# Altium PCB Mach_actor_v1.PcbDoc
Units mm, origin at the board's own origin, x right, y up, seen from the top; angles counter-clockwise.
Board outline 128.27 x 73.66 mm, 2 copper layers (Top Layer, Bottom Layer); 116 components, 88 nets, 340 pads, 76 vias.
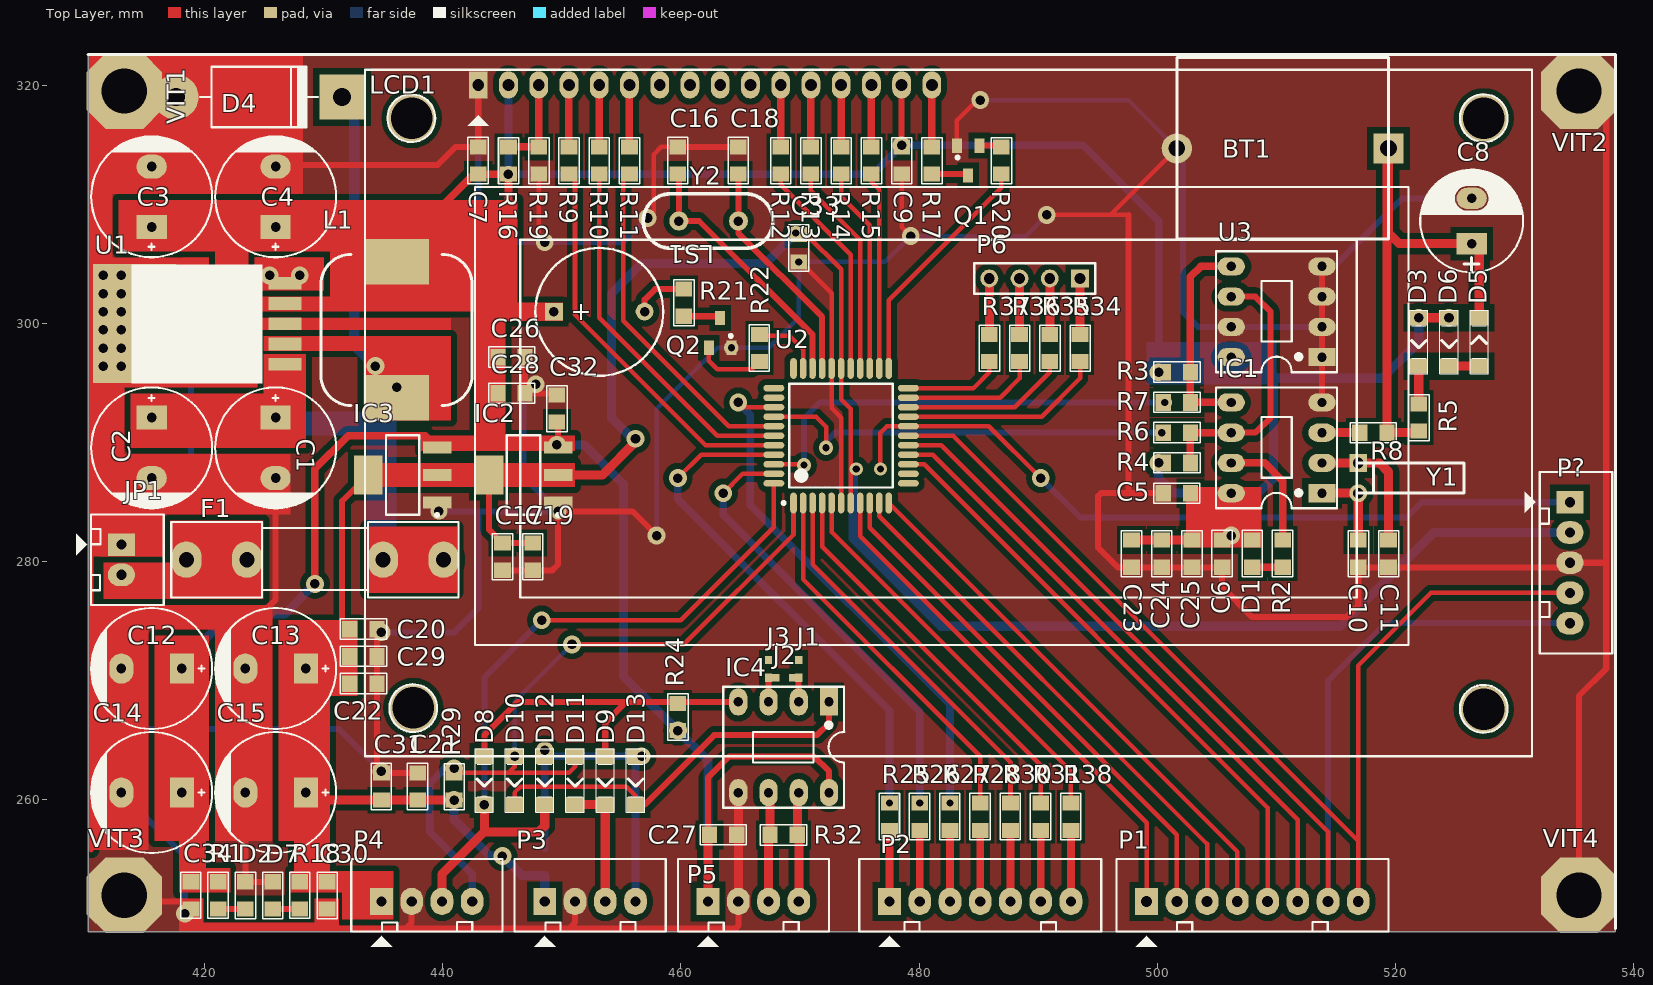
[diagram p0: Top Layer view]
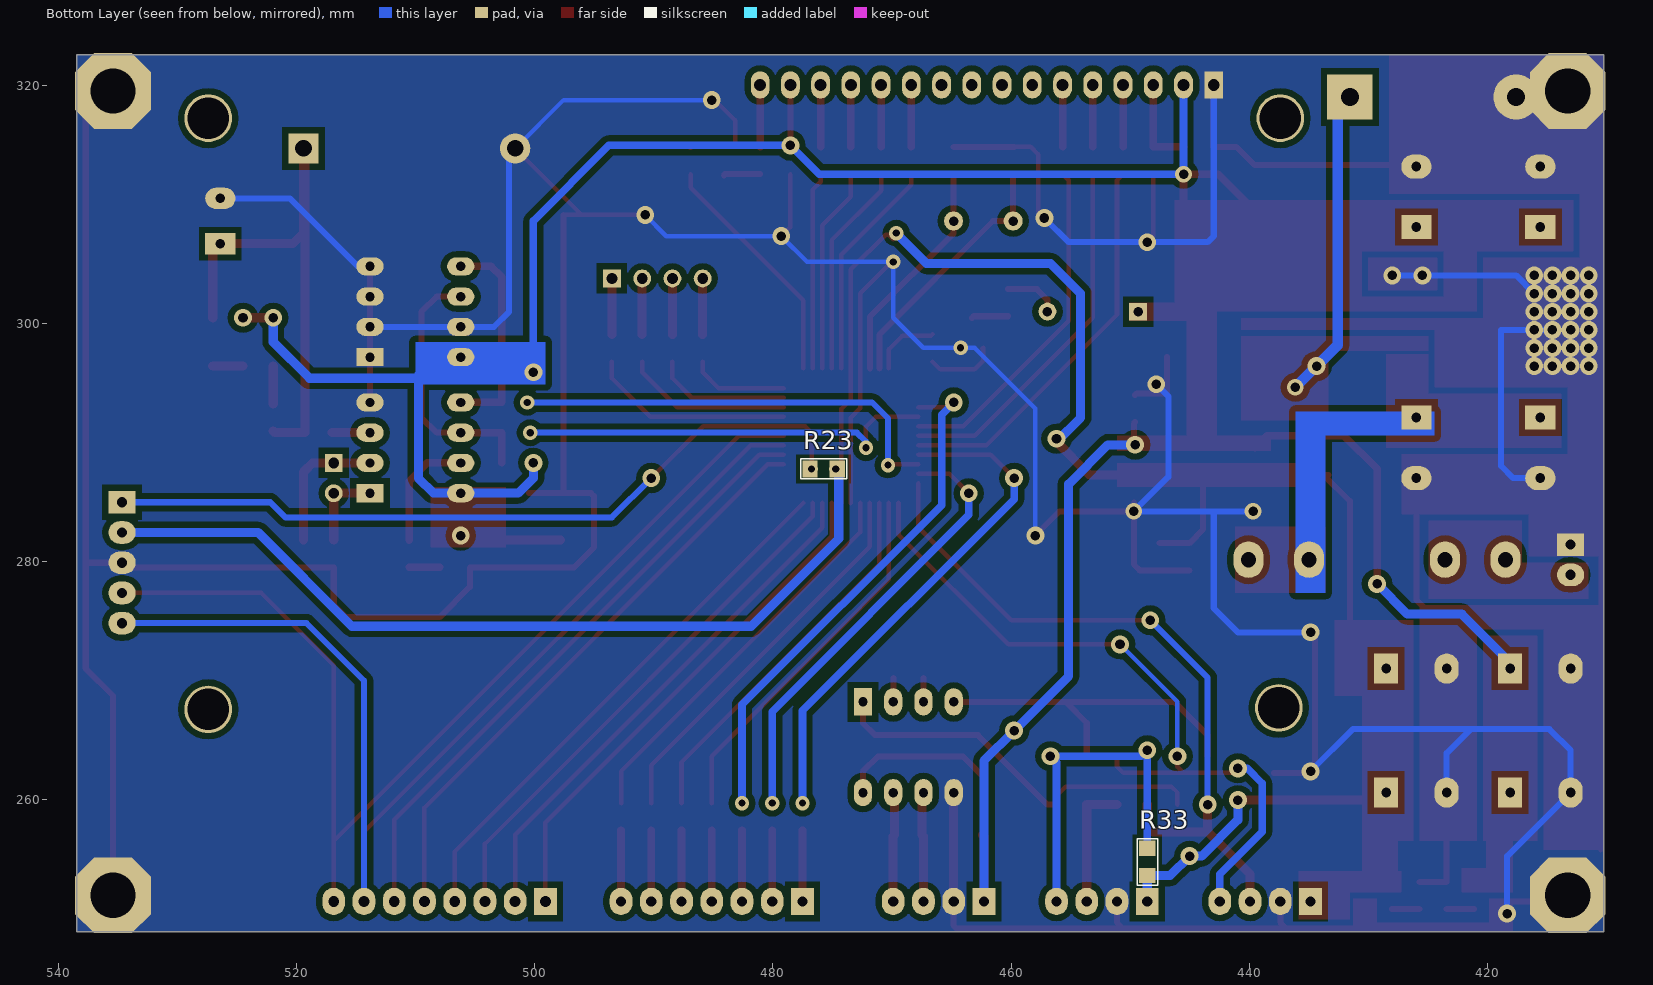
[diagram p1: Bottom Layer view, seen from below]
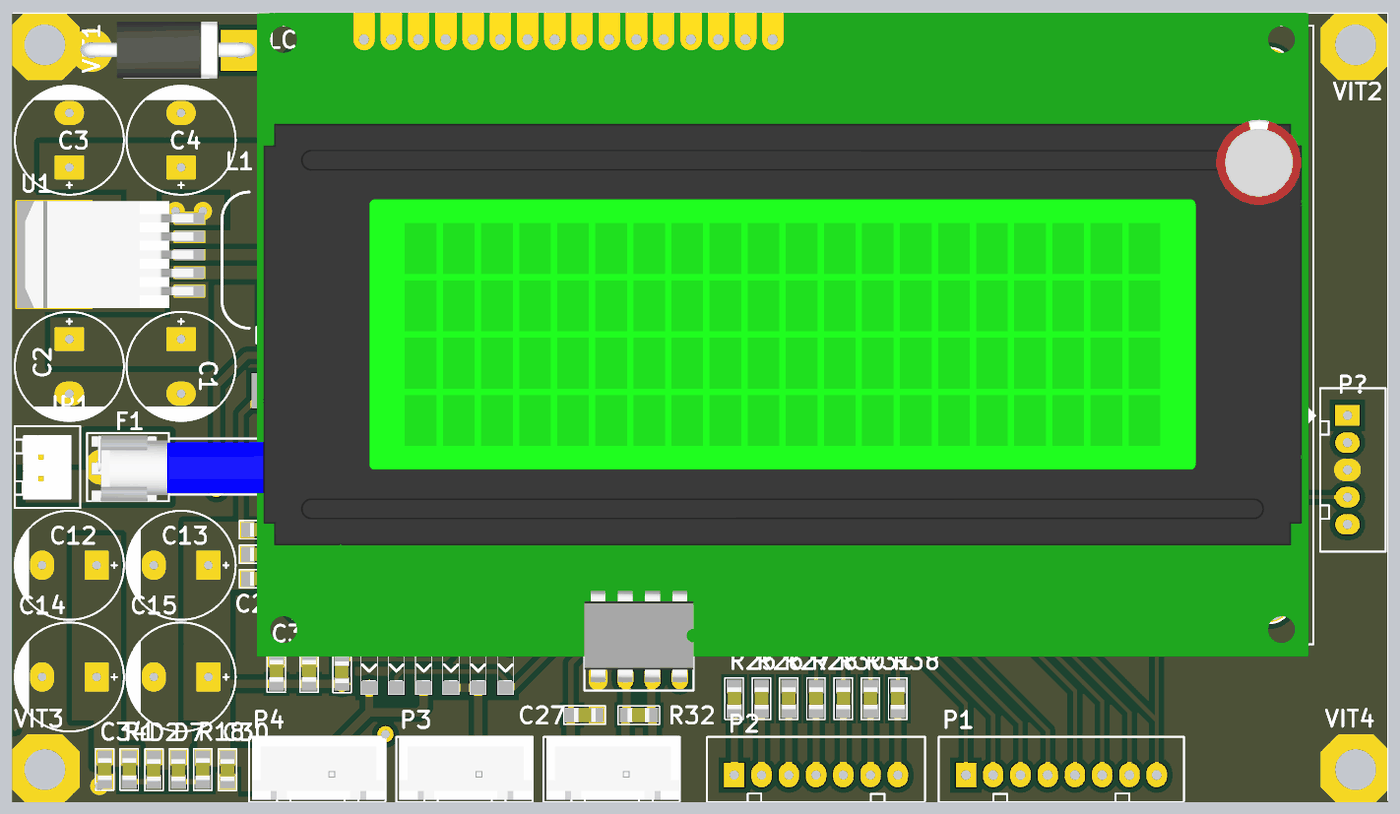
[diagram p2: 3D render of the assembled board from above, using the file's embedded part models]

## Layer stack, top to bottom
Top Layer: signal copper 0.0356
Dielectric: dielectric 0.32, FR-4, Dk 4.8
Bottom Layer: signal copper 0.0356

## Board outline
410.21,322.58 538.48,322.58 538.48,248.92 410.21,248.92

## Design rules (kind name [scope] priority, off if disabled: settings)
Clearance [All] p1: gap=0.508
PlaneConnect [All] p1: planeconnectstyle=Direct reliefexpansion=0.508 reliefentries=4 reliefconductorwidth=0.254 reliefairgap=0.254
PolygonConnect [All] p1: connectstyle=Direct reliefconductorwidth=0.254 reliefentries=4 polygonreliefangle="90 Angle"
RoutingVias [All] p1: holewidth=0.711 width=1.27 viastyle="Through Hole" minholewidth=0.711 minwidth=1.27 maxholewidth=0.711 maxwidth=1.27
SilkscreenOverComponentPads [All] p1: minsilkscreentomaskgap=0.254
SolderMaskExpansion [All] p1: expansion=0.102
Width [All] p1: maxlimit=2.54 minlimit=0.381 preferedwidth=0.508
26 further rules are at their usual default settings.

## Components (designator, comment, footprint, x,y, rotation, side; value= is the part's Value field where it differs from the comment)
BT1 "PIN 3V" PIN_NIMH 516.89,314.706 r180 top
C1 "1000uF/16V" CP2/4 425.958,292.1 r270 top
C2 "1000uF/16V" CP2/4 415.544,292.1 r270 top
C3 "1000uF/16V" CP2/4 415.544,308.102 r90 top
C4 "1000uF/16V" CP2/4 425.958,308.102 r90 top
C5 "104" SM-0805 501.65,285.75 r0 top
C6 "104" SM-0805 505.46,280.67 r270 top
C7 "104" SM-0805 442.976,313.69 r270 top
C8 "1000uF/16V" CP1.5/3.4 526.415,306.705 r90 top
C9 "104" SM-0805 478.536,313.69 r90 top
C10 "104" SM-0805 516.89,280.67 r90 top
C11 "104" SM-0805 519.43,280.67 r90 top
C12 "1000uF/16V" CP2/4 418.084,271.018 r180 top
C13 "1000uF/16V" CP2/4 428.498,271.018 r180 top
C14 "1000uF/16V" CP2/4 418.084,260.604 r180 top
C15 "1000uF/16V" CP2/4 428.498,260.604 r180 top
C16 "104" SM-0805 459.74,313.69 r270 top
C17 "104" SM-0805 445.008,280.416 r90 top
C18 "104" SM-0805 464.82,313.69 r270 top
C19 "104" SM-0805 447.548,280.416 r90 top
C20 "104" SM-0805 433.324,274.32 r180 top
C21 "104" SM-0805 437.896,261.112 r270 top
C22 "104" SM-0805 433.324,269.748 r180 top
C23 "104" SM-0805 497.84,280.67 r90 top
C24 "104" SM-0805 500.38,280.67 r90 top
C25 "104" SM-0805 502.92,280.67 r90 top
C26 "104" SM-0805 445.77,297.18 r180 top
C27 "104" SM-0805 463.55,257.048 r180 top
C28 "104" SM-0805 445.77,294.132 r180 top
C29 "104" SM-0805 433.324,272.034 r180 top
C30 "104" SM-0805 430.276,251.968 r90 top
C31 "104" SM-0805 434.848,261.112 r270 top
C32 "104" SM-0805 449.58,292.862 r90 top
C33 "104" SM-0805 469.9,306.324 r270 top
C34 "104" SM-0805 418.846,251.968 r270 top
D1 "LED5" SM-0805 508,280.67 r270 top
D2 "LED5" SM-0805 423.418,251.968 r90 top
D3 "1N4148" "1n4148 smd" 521.97,298.45 r270 top
D4 "1N5822" D5A 431.546,319.024 r180 top
D5 "1N4148" "1n4148 smd" 527.05,298.45 r90 top
D6 "1N4148" "1n4148 smd" 524.51,298.45 r270 top
D7 "LED5" SM-0805 425.704,251.968 r90 top
D8 "1N4148" "1n4148 smd" 443.484,261.62 r270 top
D9 "1N4148" "1n4148 smd" 453.644,261.62 r270 top
D10 "1N4148" "1n4148 smd" 446.024,261.62 r270 top
D11 "1N4148" "1n4148 smd" 451.104,261.62 r270 top
D12 "1N4148" "1n4148 smd" 448.564,261.62 r270 top
D13 "1N4148" "1n4148 smd" 456.184,261.62 r270 top
F1 "F1A" Fuse 429.26,280.162 r180 top
IC1 "DS1307" DIP8/W0.3 513.842,285.75 r90 top
IC2 "LM1117" SOT223-4N 446.786,287.274 r180 top
IC3 "LM1117" SOT223-4N 436.626,287.274 r180 top
IC4 "MAX485" DIP8/W0.3 472.44,268.224 r180 top
J1 "Jumper 2" "CAP 0402  TOP" 469.9,271.018 r270 top
J2 "Jumper 2" "CAP 0402  TOP" 468.63,270.256 r0 top
J3 "Jumper 2" "CAP 0402  TOP" 467.36,271.018 r270 top
JP1 "Connector 2" CON2 413.004,281.432 r270 top
L1 "300mH" Inductorsmd 442.468,293.116 r90 top
LCD1 "LCD 20x4A" LCD20X4A 442.976,320.04 r0 top
LS1 "Speaker" SPEAKER 449.326,300.99 r0 top
P1 "Header 8" con8 499.11,251.46 r0 top
P2 "Header 7" CON7 477.52,251.46 r0 top
P3 "Header 4" CON4 448.564,251.46 r0 top
P4 "Header 4" CON4 434.848,251.46 r0 top
P5 "Header 4" CON4 462.28,251.46 r0 top
P6 "Header 4" HDR1X4 493.522,303.784 r180 top
P? "Header 5" CON5 534.67,284.988 r270 top
Q1 "C1815" SOT23B 484.124,313.69 r180 top
Q2 "C1815" SOT23B 463.296,299.212 r0 top
R1 "2k2" SM-0805 421.132,251.968 r270 top
R2 "4K7" SM-0805 510.54,280.67 r270 top
R3 "4K7" SM-0805 501.65,295.91 r180 top
R4 "4K7" SM-0805 501.65,288.29 r180 top
R5 "10" SM-0805 521.97,292.1 r90 top
R6 "10" SM-0805 501.65,290.83 r180 top
R7 "10" SM-0805 501.65,293.37 r180 top
R8 "10" SM-0805 518.16,290.83 r0 top
R9 "10" SM-0805 450.596,313.69 r90 top
R10 "10" SM-0805 453.136,313.69 r90 top
R11 "10" SM-0805 455.676,313.69 r90 top
R12 "10" SM-0805 468.376,313.69 r90 top
R13 "10" SM-0805 470.916,313.69 r90 top
R14 "10" SM-0805 473.456,313.69 r90 top
R15 "10" SM-0805 475.996,313.69 r90 top
R16 "10k" SM-0805 445.516,313.69 r90 top
R17 "10" SM-0805 481.076,313.69 r90 top
R18 "2k2" SM-0805 427.99,251.968 r270 top
R19 "1k" SM-0805 448.056,313.69 r90 top
R20 "2k2" SM-0805 486.918,313.69 r90 top
R21 "220" SM-0805 460.248,301.752 r90 top
R22 "2k2" SM-0805 466.598,297.942 r270 top
R23 "10k" SM-0805 475.742,287.782 r0 bottom
R24 "10k" SM-0805 459.74,266.954 r90 top
R25 "2k2" SM-0805 477.52,258.572 r270 top
R26 "2k2" SM-0805 480.06,258.572 r270 top
R27 "2k2" SM-0805 482.6,258.572 r270 top
R28 "2k2" SM-0805 485.14,258.572 r270 top
R29 "10k" SM-0805 440.944,261.112 r90 top
R30 "2k2" SM-0805 487.68,258.572 r270 top
R31 "2k2" SM-0805 490.22,258.572 r270 top
R32 "2k2" SM-0805 468.63,257.048 r0 top
R33 "10k" SM-0805 448.564,254.787 r90 bottom
R34 "1k" SM-0805 493.522,297.942 r90 top
R35 "1k" SM-0805 490.982,297.942 r90 top
R36 "1k" SM-0805 488.442,297.942 r90 top
R37 "1k" SM-0805 485.902,297.942 r90 top
R38 "2k2" SM-0805 492.76,258.572 r270 top
U1 "LM2596T-5.0" TO263-5 426.72,299.974 r90 top
U2 "PIC18F46K20T-E/PT" TQFP-PT44_N 473.456,290.576 r90 top
U3 "24C02" DIP8/W0.3 513.842,297.18 r90 top
VIT1 "1" VIT 413.258,319.532 r0 top
VIT2 "1" VIT 535.432,319.532 r0 top
VIT3 "1" VIT 413.258,251.968 r0 top
VIT4 "1" VIT 535.432,251.968 r0 top
Y1 "32.768KHz" XTAL32K 516.89,288.29 r270 top
Y2 "4MHz" XTAL 462.28,308.61 r180 top

## Footprints (in the part's own frame and the unit in brackets; to place one, negate y for a bottom-side part, rotate by r counter-clockwise, add the part's x,y. Pads: shape width x height; smd on the part's side, far side on the other; paste and mask are expansions set on the pad)
"1n4148 smd" [mil]
  rect 50x60 smd: 1(-80,0) 2(80,0)
  silkscreen extent -105,-30 105,30, body extent -73,-31 73,31
"CAP 0402  TOP" [mm]
  rect 0.7x0.6 smd: 1(-0.721,-0.008) 2(0.778,-0.008)
  body extent -0.5,-0.3 0.5,0.3, height 0.2
CON2 [mil] "CON2"
  rect 75x90 hole 34: 1(0,0)
  oval 75x90 hole 34: 2(100,0)
  silkscreen extent -100,-150 200,140, body extent -68,-70 168,107, height 236
CON4 [mil] "CON4"
  rect 75x90 hole 34: 1(0,0)
  oval 75x90 hole 34: 2(100,0) 3(200,0) 4(300,0)
  silkscreen extent -100,-150 400,140, body extent -90,-90 398,136, height 276
CON5 [mil] "CON5"
  rect 75x90 hole 34: 1(0,0)
  oval 75x90 hole 34: 2(100,0) 3(200,0) 4(300,0) 5(400,0)
  silkscreen extent -100,-150 500,140
CON7 [mil] "CON7"
  rect 75x90 hole 34: 1(0,0)
  oval 75x90 hole 34: 2(100,0) 3(200,0) 4(300,0) 5(400,0) 6(500,0) 7(600,0)
  silkscreen extent -100,-150 700,140
con8 [mil] "CON8"
  rect 75x90 hole 36: 1(0,0)
  oval 75x90 hole 36: 2(100,0) 3(200,0) 4(300,0) 5(400,0) 6(500,0) 7(600,0) 8(700,0)
  silkscreen extent -100,-150 800,140
CP1.5/3.4 [mil] "Tu hoa 220->470uF,16V, 470uF/16V,25V"
  rect 70x100 hole 32: 1(0,0)
  oval 70x100 hole 32: 2(150,0)
  silkscreen extent -95,-170 245,170, body extent -85,-157 230,157, height 446
CP2/4 [mil] "Tu hoa 1000uF/16V/25V"
  rect 80x100 hole 32: 1(0,0)
  oval 80x100 hole 32: 2(200,0)
  silkscreen extent -100,-200 300,200
D5A [mil] "Diode 5A, W 200mil, L 550mil"
  round 150 hole 60: 1(550,0)
  rect 150x150 hole 60: 2(0,0)
  silkscreen extent 80,-100 470,100, body extent -52,-106 590,103, height 254
DIP8/W0.3 [mil] "8 PIN, W 300mil, Pin to pin 100mil"
  rect 60x90 hole 31: 1(0,0)
  oval 60x90 hole 31: 2(100,0) 3(200,0) 4(300,0) 5(300,300) 6(200,300) 7(100,300) 8(0,300)
  silkscreen extent -50,-50 350,350, body extent -50,-40 350,336, height 201
Fuse [mil] "De Fuse"
  oval 100x120 hole 50: 1(-425,0) 1(-225,0) 2(225,0) 2(425,0)
  silkscreen extent -475,-125 475,125, body extent -448,-117 459,127, height 378
HDR1X4 [mm] "Connector; Header; 4 Position"
  rect 1.5x1.5 hole 0.9: 1(0,0)
  round 1.5 hole 0.9: 2(2.54,0) 3(5.08,0) 4(7.62,0)
  silkscreen extent -1.27,-1.27 8.89,1.27, body extent -1.27,-1.27 8.89,1.27, height 7
Inductorsmd [mil] "12x12x6mm"
  rect 150x215 smd: 1(25,250) 2(475,250)
  silkscreen extent 0,0 500,500
LCD20X4A [mil] "LCD dipslay 20x4, 16 pin"
  rect 62x90 hole 39: 1(0,0)
  oval 62x90 hole 39: 2(100,0) 3(200,0) 4(300,0) 5(400,0) 6(500,0) 7(600,0) 8(700,0) 9(800,0) 10(900,0) 11(1000,0) 12(1100,0) 13(1200,0) 14(1300,0) 15(1400,0) 16(1500,0)
  round 157.48 hole 137.8: "Hole 0"(-220,-110) "Hole 0"(-215,-2060) "Hole 0"(3325,-2065) "Hole 0"(3325,-110)
  silkscreen extent -375,-2220 3485,50, body extent -392,-2264 3466,98, height 417
PIN_NIMH [mil] "Through hole button, column spacing 200mil"
  rect 100x100 hole 55: 1(-100,0)
  round 100 hole 55: 2(600,0)
  silkscreen extent -100,-300 600,300
SM-0805 [mil] "Compoment SMD 80x50mil"
  rect 50x55 smd: 1(-45,0) 2(45,0)
  silkscreen extent -77,-34 76,33, body extent -42,-25 38,25, height 24
SOT23B [mm] "SOT 23B"
  rect 0.85x1.2 smd: 1(0.94,-1.245) 2(0,1.25) 3(-0.95,-1.25)
  silkscreen extent 0.77,-0.38 1.02,-0.13, body extent -1.5,-1.3 1.5,1.2, height 1.06
SOT223-4N [mm] "SOT223, 4-Leads, Body 6.5x3.5mm, Pitch 2.3mm, Lead Span 7mm, IPC Medium Density"
  rect 2.4x1 smd: 1(-2.9,2.3) 2(-2.9,0) 3(-2.9,-2.3)
  rect 2.4x3.3 smd: 4(2.9,0)
  silkscreen extent -3.03,-3.35 1.4,3.47, body extent -3.39,-3.27 3.5,3.23, height 1.72
SPEAKER [mm]
  rect 1.5x1.5 hole 0.8: 1(0,0)
  round 1.5 hole 0.8: 2(7.62,0.013)
  silkscreen extent -1.55,-5.38 9.18,5.36, body extent -2.22,-6 13.24,6, height 4.5
TO263-5 [mm] "LM2576-SMD"
  rect 1.07x2.75 smd: 1(-3.4,-0.025) 2(-1.7,-0.025) 3(0,-0.025) 4(1.7,-0.025) 5(3.4,-0.025)
  rect 10x7 smd: 6(0.025,12.598)
  silkscreen extent -5,1.85 5,12.88, body extent -5,-0.38 5,15.29, height 4.79
TQFP-PT44_N [mm] "Thin QFP, 44-Leads, Body 10x10mm, Pitch 0.8mm, IPC Medium Density"
  oval 1.75x0.55 smd: 1(-5.65,4) 2(-5.65,3.2) 3(-5.65,2.4) 4(-5.65,1.6) 5(-5.65,0.8) 6(-5.65,0) 7(-5.65,-0.8) 8(-5.65,-1.6) 9(-5.65,-2.4) 10(-5.65,-3.2) 11(-5.65,-4) 23(5.65,-4) 24(5.65,-3.2) 25(5.65,-2.4) 26(5.65,-1.6) 27(5.65,-0.8) 28(5.65,0) 29(5.65,0.8) 30(5.65,1.6) 31(5.65,2.4) 32(5.65,3.2) 33(5.65,4)
  oval 0.55x1.75 smd: 12(-4,-5.65) 13(-3.2,-5.65) 14(-2.4,-5.65) 15(-1.6,-5.65) 16(-0.8,-5.65) 17(0,-5.65) 18(0.8,-5.65) 19(1.6,-5.65) 20(2.4,-5.65) 21(3.2,-5.65) 22(4,-5.65) 34(4,5.65) 35(3.2,5.65) 36(2.4,5.65) 37(1.6,5.65) 38(0.8,5.65) 39(0,5.65) 40(-0.8,5.65) 41(-1.6,5.65) 42(-2.4,5.65) 43(-3.2,5.65) 44(-4,5.65)
  silkscreen extent -5.77,-4.35 4.35,4.95, body extent -5,-5 5,5, height 1.2
VIT [mm] "VIT"
  oct 6.35x6.35 hole 3.81: VIT1(0,0)
XTAL [mm]
  round 1.6 hole 0.8: 1(-2.552,0.001) 2(2.448,0.001)
  silkscreen extent -5.44,-2.29 5.44,2.29, body extent -5.55,-2.32 5.62,2.35, height 3.63
XTAL32K [mm] "Connector; Header; 2 Position"
  rect 1.5x1.5 hole 0.9: 1(0,0)
  round 1.5 hole 0.9: 2(2.54,0)
  silkscreen extent 0,0 2.54,8.89

## Part data
BT1: "Battery 3VDC"
C1 C2 C3 C4 C8 C12 C13 C14 C15: library part CP4, "Cap 1000uF/16V - 220uF/50V"
C5 C6 C7 C9 C10 C11 C16 C17 C18 C19 C20 C21 C22 C23 C24 C25 C26 C27 C28 C29 C30 C31 C32 C33 C34: library part CM, "Cap SMD"
D1 D2 D7: library part "LED 5mm", "LED 5mm"
D3 D5 D6 D8 D9 D10 D11 D12 D13: library part D1A, "Diode 1A"
D4: library part D5A, "Diode 5A"
F1: library part Fuse, "Fuse"
IC1: "Real Timer Serial"
IC2 IC3: "3v3"
IC4: "RS232 - RS485 (Same sn75176)"
J1 J2 J3: library part "JP 2"
JP1: library part CON2
L1: library part L1, "Inductor"
LCD1: library part LCD20x4A, "LCD dipslay 20 char, 4 line"
LS1: "Loudspeaker"
P1: "Header, 8-Pin"
P2: "Header, 7-Pin"
P3 P4 P5 P6: "Header, 4-Pin"
P?: "Header, 5-Pin"
Q1 Q2: "NPN 600mW, ECB"
R1 R2 R3 R4 R5 R6 R7 R8 R9 R10 R11 R12 R13 R14 R15 R16 R17 R18 R19 R20 R21 R22 R23 R24 R25 R26 R27 R28 R29 R30 R31 R32 R33 R34 R35 R36 R37 R38: library part R, "Resistor 1/4W"
U1: library part LM2576T-5.0, "SIMPLE SWITCHER; 3A Step-Down Voltage Regulator"
U2: "Flash Microcontroller with 10-Bit A/D and nanoWatt Technology, 32K Flash, 44-Pin TQFP, Extended Temperature Range, Tape and Reel"
U3: "Two-wired Serial EEPROM 2K(256x6)"
VIT1 VIT2 VIT3 VIT4: library part VIT, "Oc Vit"
Y1: library part XTAL/32KHz, "Crystal Oscillator"
Y2: library part XTAL, "Crystal Oscillator"

## Via types
v1: diameter 1.5, hole 0.8, Top Layer to Bottom Layer, 60 vias
v2: diameter 1.2, hole 0.6, Top Layer to Bottom Layer, 10 vias
v3: diameter 1.4, hole 0.8, Top Layer to Bottom Layer, 4 vias
v4: diameter 1.1, hole 0.6, Top Layer to Bottom Layer, 2 vias

## Nets (pads, with @x,y where several pads share a name; then routed paths per layer and width w, separated by ;. In a path a pad name is that pad's centre, name@x,y a point inside that pad or via, vN(x,y) a via of type N, cw(c..) or ccw(c..) an arc to the next point about the centre after c; other vN are vias at no path point)
12V: F1.2 JP1.2
485_DE: J3.1
485_RE: J1.1
+3.3V: C13.1 C15.1 C17.2 C19.2 C20.2 C21.2 C22.2 C29.2 C30.2 C31.2 C33.1 IC2.2 IC2.4 IC3.2 IC3.4 P3.1 P4.1 P?.2 R18.1 R23.1 R29.1 R33.1 U2.7 U2.28 | length 225.1
  Top Layer w0.381: C33.1@469.9,307.086 470.281,307.467 470.535,307.467 473.456,304.546 U2.28 473.456,293.624 474.256,292.824 U2.7
  Top Layer w0.508: R18.1@428.498,253.619 R18.1 C30.2 433.197,253.111 P4.1 ; C15.1 C13.1 429.768,271.018 431.546,272.796 431.546,285.094 IC3.4 ; IC3.4@433.324,287.274 IC3.4 ; C19.2 C17.2 443.886,282.681 IC2.4 ; IC2.2 IC2.4 ; IC3.4 IC3.2 IC2.4
  Top Layer w0.762: C15.1 429.133,259.969 C31.2 C21.2 v1(440.944,259.969) ; IC2.2 453.39,287.274 v1@456.311,290.195
  Bottom Layer w0.762: v1(440.944,259.969) 440.944,258.318 443.992,255.27 v1(445.008,255.27) 446.634,253.644 R33.1 P3.1 ; v1@456.184,290.068 454.152,292.1 454.152,302.514 456.692,305.054 467.106,305.054 v2(469.646,307.594) ; v4(474.726,287.782) 474.472,287.528 474.472,281.94 481.838,274.574 515.366,274.574 523.24,282.448 P?.2
  other v1: 456.184,290.322
+5V: C3.1 C4.1 C5.2 C6.1 C7.2 C9.2 C12.1 C14.1 C23.2 C24.2 C25.2 C26.2 C27.2 C28.2 C32.1 C34.1 D1.1 D3.1 D6.1 IC1.8 IC2.3 IC3.3 IC4.8 L1.2 LCD1.2 LCD1.15 LS1.1 P5.1 R1.1 R3.2 R4.2 R16.1 R24.1 U1.4 U3.8 | length 366.9
  Top Layer w0.508: C3.1 421.64,308.102 ; C12.1 C14.1 418.084,253.873 C34.1 R1.1 ; C4.1 421.64,308.102 ; L1.2@436.118,306.07 L1.2 ; IC3.3 443.484,289.574 ; 444.627,294.894 443.484,294.894 ; C32.1 449.686,291.613 IC2.3 443.484,289.574 ; C27.2@462.28,256.921 462.28,261.874 464.058,263.652 471.17,263.652 472.44,262.382 IC4.8 ; C9.2 v1(478.536,314.96) LCD1.15 ; 421.64,308.102 421.64,302.768 422.734,301.674 U1.4 434.516,301.674 435.61,302.768 435.61,304.673 L1.2 ; L1.2 441.579,305.181 443.484,303.276 443.484,294.894 ; 443.484,289.574 443.484,294.894
  Top Layer w0.635: v1(429.26,278.13) 429.26,287.782 432.054,290.576 438.524,290.576 IC3.3 ; L1.2@435.61,304.673 435.61,305.181 L1.2@436.118,305.689 ; L1.2@436.118,306.07 442.595,312.547 C7.2 v3(445.516,312.547) 445.516,301.752 446.278,300.99 LS1.1
  Top Layer w0.762: P5.1 462.28,256.921 C27.2 ; C23.2 C24.2 C25.2 C6.1 ; C5.2 IC1.8 506.222,282.575 C6.1 ; D1.1 C6.1 ; v1(521.97,300.482) v1(524.51,300.482)
  Bottom Layer w0.635: LCD1.2 v3(445.516,312.547) 476.123,312.547 v1(478.536,314.96) 493.776,314.96 500.126,308.61 v1(500.126,295.91)
  Bottom Layer w0.762: C12.1 418.084,271.526 422.148,275.59 426.72,275.59 v1(429.26,278.13) ; v1(449.58,289.814) 451.866,289.814 455.168,286.512 455.168,270.383 v1(459.74,265.811) 462.28,263.271 P5.1 ; v1(500.126,288.29) 500.126,287.02 501.396,285.75 IC1.8 508.508,285.75 509.778,287.02 509.778,295.148 ; U3.8 508.254,297.18 509.778,295.656 509.778,295.402 518.922,295.402 521.97,298.45 v1(521.97,300.482)
  other v1: 506.222,282.194
A: IC4.6 P5.3 R32.1 | length 9.2
  Top Layer w0.762: P5.3 467.36,256.921 R32.1 467.487,260.477 IC4.6
B: IC4.7 P5.4 R32.2 | length 9.2
  Top Layer w0.762: P5.4 469.9,256.921 R32.2 469.773,260.477 IC4.7
D4: R12.1 U2.27 | length 18.8
  Top Layer w0.381: R12.1 468.376,311.658 474.256,305.778 U2.27
D5: R13.1 U2.26 | length 18
  Top Layer w0.381: R13.1 470.916,311.15 475.056,307.01 U2.26
D6: R14.1 U2.25 | length 17.3
  Top Layer w0.381: R14.1 473.456,310.642 475.856,308.242 U2.25
D7: R15.1 U2.24 | length 16.6
  Top Layer w0.381: R15.1 475.996,311.912 476.656,311.252 U2.24
EN: R11.1 U2.38 | length 28.8
  Top Layer w0.381: R11.1 455.168,312.039 455.168,300.228 464.02,291.376 U2.38
GND: BT1.2 C1.2 C2.2 C3.2 C4.2 C5.1 C6.2 C7.1 C8.2 C9.1 C10.1 C11.1 C12.2 C13.2 C14.2 C15.2 C16.1 C17.1 C18.1 C19.1 C20.1 C21.1 C22.1 C23.1 C24.1 C25.1 C26.1 C27.1 C28.1 C29.1 C30.1 C31.1 C32.2 C33.2 C34.2 D2.2 D4.1 D7.2 IC1.4 IC2.1 IC3.1 IC4.5 JP1.1 LCD1.1 P3.2 P4.2 P5.2 P?.3 Q1.1 Q2.1 R19.1 U1.3 U1.5 U2.6 U2.29 U3.1 U3.2 U3.3 U3.4 U3.7 VIT1.VIT1 VIT2.VIT1 VIT3.VIT1 VIT4.VIT1 | length 711.9
  Top Layer w0.381: R19.1 448.056,307.34 v1(448.564,306.832) ; v1(457.2,308.864) 457.708,309.372 457.708,314.198 458.343,314.833 C16.1 ; C33.2@470.154,305.054 472.656,302.552 U2.29 472.656,292.9 473.456,292.1 U2.6 ; C9.1 478.536,308.102 v1(479.298,307.34) ; Q1.1 483.184,317.068 484.886,318.77 v1(485.14,318.77) ; v1(490.728,309.118) 497.586,309.118 ; 496.062,309.118 BT1.2
  Top Layer w0.508: C14.2 C12.2 ; VIT3.VIT1 415.036,251.968 415.544,251.46 418.211,251.46 C34.2 418.846,249.936 419.608,249.174 430.276,249.174 ; v1@414.122,299.999 414.147,299.974 U1.3 ; C2.2 C1.2 425.958,276.798 425.258,276.098 425.196,276.098 424.434,275.336 ; C3.2 C4.2 ; D4.1 417.83,318.77 424.688,318.77 425.958,317.5 C4.2 ; C13.2 C15.2 D2.2 D7.2 ; C30.1 430.276,249.174 ; C20.1 C29.1 C22.1 434.467,262.636 C31.1 C21.1 ; P4.2 437.388,249.682 436.88,249.174 ; LCD1.1 C7.1 441.071,314.833 439.547,313.309 426.085,313.309 C4.2 ; C17.1 C19.1 449.199,279.273 449.686,279.76 v3(449.686,284.226) ; C26.1 C28.1 449.453,294.132 C32.2 ; IC2.1 v3(449.686,284.226) ; P3.2 451.104,249.682 450.596,249.174 ; v1(457.962,282.194) 455.93,284.226 v3(449.686,284.226) ; C16.1 C18.1 ; P5.2 464.82,249.428 464.566,249.174 450.596,249.174 ; 497.586,309.118 497.586,285.75 ; C5.1 497.586,285.75 ; IC1.4 U3.1 U3.2 U3.3 U3.4 ; VIT4.VIT1 535.432,268.732 537.718,271.018 537.718,279.908 ; VIT2.VIT1 537.718,317.246 537.718,279.908 ; 430.276,249.174 436.88,249.174 ; 436.88,249.174 450.596,249.174 ; 497.586,285.75 495.3,285.75 495.046,285.496 495.046,281.178 496.697,279.527 C23.1 C24.1 C25.1 C6.2 505.46,277.876 508,275.336 515.874,275.336 516.89,276.352 C10.1 C11.1 534.289,279.527 P?.3 537.718,279.908
  Top Layer w0.762: P5.2 IC4.5
  Bottom Layer w0.381: v1(457.962,282.194) 457.962,292.862 463.067,297.967 v2(464.236,297.967) 467.385,297.967 469.9,300.482 v2(469.9,305.181) 477.139,305.181 v1(479.298,307.34) 488.95,307.34 v1(490.728,309.118) ; v1(485.14,318.77) 497.586,318.77 BT1.2
  Bottom Layer w0.508: v1@414.274,299.212 v1(414.528,299.466) 418.846,299.466 418.846,288.036 417.83,287.02 C2.2 ; v1(416.052,302.514) 417.576,304.038 v1(425.45,304.038) v1(427.99,304.038) ; v1(418.338,250.444) 418.338,255.27 C14.2 413.004,264.16 414.782,265.938 421.386,265.938 ; C15.2 423.418,263.906 421.386,265.938 ; v1(434.848,262.382) 431.292,265.938 421.386,265.938 ; v1@435.102,274.32 v1(434.848,274.066) 440.944,274.066 442.976,276.098 442.976,284.226 ; v3(439.674,284.226) 442.976,284.226 ; LCD1.1 442.976,307.34 443.484,306.832 v1(448.564,306.832) 455.168,306.832 v1(457.2,308.864) ; v1(447.802,294.894) 446.786,293.878 446.786,287.126 v3(449.686,284.226) 442.976,284.226 ; BT1.2 502.158,314.198 502.158,300.99 503.428,299.72 U3.7 U3.2 ; U3.4 514.858,304.8 520.573,310.515 C8.2
  other v1: 411.48,296.418 413.004,296.418 414.528,296.418 416.052,296.418 411.48,297.942 413.004,297.942 414.528,297.942 416.052,297.942 411.48,299.466 413.004,299.466 416.052,299.466 411.48,300.99 413.004,300.99 414.528,300.99 416.052,300.99 411.48,302.514 413.004,302.514 414.528,302.514 411.48,304.038 413.004,304.038 414.528,304.038 416.052,304.038
LED_LCD: R20.1 U2.23 | length 20.2
  Top Layer w0.381: U2.23 477.456,301.942 486.918,311.404 R20.1
NetBT1_1: BT1.1 C8.1 D5.2 R5.1 R8.2 | length 47.6
  Top Layer w0.762: R5.1 521.843,290.83 R8.2 519.303,314.579 BT1.1 519.43,307.594 520.319,306.705 C8.1 527.05,306.07 D5.2
NetC1_1: C1.1 C2.1 F1.1 U1.1 | length 35.1
  Top Layer w0.508: C2.1 C1.1 426.745,292.887 U1.1
  Bottom Layer w0.508: C1.1 433.07,292.1 434.975,290.195 F1.1@434.975,280.162
NetC10_2: C10.2 IC1.1 Y1.2 | length 7
  Top Layer w0.762: IC1.1 Y1.2 C10.2
NetC11_2: C11.2 IC1.2 Y1.1 | length 11.6
  Top Layer w0.762: IC1.2 Y1.1 518.668,288.29 519.43,287.528 C11.2
NetD1_2: D1.2 R2.2 | length 2.5
  Top Layer w0.635: D1.2 R2.2
NetD2_1: D2.1 R1.2 | length 2.3
  Top Layer w0.508: R1.2 D2.1
NetD3_2: D3.2 R5.2 | length 3.2
  Top Layer w0.762: R5.2 D3.2
NetD4_2: D4.2 L1.1 U1.2 | length 39.8
  Top Layer w0.508: U1.2 435.532,298.274 436.118,297.688 v3(436.118,294.64) L1.1
  Bottom Layer w0.889: D4.2 432.562,318.008 432.562,298.196 v3(436.118,294.64)
  other v1: 434.34,296.418
NetD5_1: D5.1 D6.2 | length 2.5
  Top Layer w0.762: D6.2 D5.1
NetD7_1: D7.1 R18.2 | length 2.3
  Top Layer w0.508: D7.1 R18.2
NetIC1_3: IC1.3 R8.1 | length 3.2
  Top Layer w0.762: IC1.3 R8.1
NetIC1_7: IC1.7 R2.1 | length 9.9
  Top Layer w0.635: IC1.7 509.016,288.29 510.54,286.766 R2.1
NetLCD1_3: LCD1.3 R16.2 R19.2 | length 7.7
  Top Layer w0.635: R16.2 R19.2 LCD1.3
NetLCD1_4: LCD1.4 R9.2 | length 5.2
  Top Layer w0.635: R9.2 LCD1.4
NetLCD1_5: LCD1.5 R10.2 | length 5.2
  Top Layer w0.635: R10.2 LCD1.5
NetLCD1_6: LCD1.6 R11.2 | length 5.2
  Top Layer w0.635: R11.2 LCD1.6
NetLCD1_11: LCD1.11 R12.2 | length 5.2
  Top Layer w0.635: R12.2 LCD1.11
NetLCD1_12: LCD1.12 R13.2 | length 5.2
  Top Layer w0.635: R13.2 LCD1.12
NetLCD1_13: LCD1.13 R14.2 | length 5.2
  Top Layer w0.635: R14.2 LCD1.13
NetLCD1_14: LCD1.14 R15.2 | length 5.2
  Top Layer w0.635: R15.2 LCD1.14
NetLCD1_16: LCD1.16 R17.2 | length 5.2
  Top Layer w0.635: R17.2 LCD1.16
NetLS1_2: LS1.2 R21.2 | length 4.7
  Top Layer w0.508: LS1.2 456.946,302.006 457.835,302.895 R21.2
NetP1_1: P1.1 U2.8 | length 43.4
  Top Layer w0.381: U2.8 475.056,282.118 499.11,258.064 P1.1
NetP1_2: P1.2 U2.9 | length 44.2
  Top Layer w0.381: U2.9 475.856,282.842 501.65,257.048 P1.2
NetP1_3: P1.3 U2.10 | length 44.9
  Top Layer w0.381: U2.10 476.656,283.82 504.19,256.286 P1.3
NetP1_4: P1.4 U2.11 | length 45.6
  Top Layer w0.381: U2.11 506.73,255.652 P1.4
NetP1_5: P1.5 U2.14 | length 50
  Top Layer w0.381: U2.14 480.428,288.176 509.27,259.334 P1.5
NetP1_6: P1.6 U2.15 | length 52.3
  Top Layer w0.381: U2.15 481.152,288.976 511.81,258.318 P1.6
NetP2_1: P2.1 R25.2 | length 6
  Top Layer w0.635: P2.1 R25.2
NetP2_2: P2.2 R26.2 | length 6
  Top Layer w0.635: P2.2 R26.2
NetP2_3: P2.3 R27.2 | length 6
  Top Layer w0.635: P2.3 R27.2
NetP2_4: P2.4 R28.2 | length 6
  Top Layer w0.635: P2.4 R28.2
NetP2_5: P2.5 R30.2 | length 6
  Top Layer w0.635: P2.5 R30.2
NetP2_6: P2.6 R31.2 | length 6
  Top Layer w0.635: P2.6 R31.2
NetP2_7: P2.7 R38.2 | length 6
  Top Layer w0.635: P2.7 R38.2
NetP6_1: P6.1 R34.2 | length 4.7
  Top Layer w0.762: R34.2 P6.1
NetP6_2: P6.2 R35.2 | length 4.7
  Top Layer w0.762: R35.2 P6.2
NetP6_3: P6.3 R36.2 | length 4.7
  Top Layer w0.762: R36.2 P6.3
NetP6_4: P6.4 R37.2 | length 4.7
  Top Layer w0.762: R37.2 P6.4
NetQ1_2: Q1.2 R17.1 | length 3.1
  Top Layer w0.508: R17.1 484.017,312.547 Q1.2
NetQ1_3: Q1.3 R20.2 | length 1.9
  Top Layer w0.508: Q1.3 486.811,314.94 R20.2
NetQ2_2: Q2.2 R21.1 | length 3.1
  Top Layer w0.508: R21.1 463.149,300.609 Q2.2
NetQ2_3: Q2.3 R22.2 | length 6
  Top Layer w0.381: Q2.3@462.407,297.901 Q2.3 462.346,296.86 463.042,296.164 465.963,296.164 R22.2
NetR34_1: R34.1 U2.19 | length 17.1
  Top Layer w0.381: U2.19 490.296,292.176 493.522,295.402 R34.1
NetR35_1: R35.1 U2.20 | length 14
  Top Layer w0.381: U2.20 488.048,292.976 490.982,295.91 R35.1
NetR36_1: R36.1 U2.21 | length 11.4
  Top Layer w0.381: U2.21 486.816,293.776 488.442,295.402 R36.1
NetR37_1: R37.1 U2.22 | length 8.2
  Top Layer w0.381: U2.22 484.568,294.576 485.902,295.91 R37.1
PGC: P1.7 P?.5 U2.16 | length 95.4
  Top Layer w0.381: U2.16 481.876,289.776 514.35,257.302 P1.7
  Bottom Layer w0.508: P1.7 514.35,270.002 519.176,274.828 P?.5
PGD: P1.8 P?.4 U2.17 | length 92
  Top Layer w0.381: U2.17 482.854,290.576 516.89,256.54 ; P1.8 516.89,256.54 ; P?.4 522.986,277.368 516.89,271.272 516.89,256.54
RESET: P?.1 R23.2 U2.18 | length 64.9
  Top Layer w0.381: v4(476.758,287.782) 476.758,290.83 477.304,291.376 U2.18 485.864,291.376 v1(490.22,287.02)
  Bottom Layer w0.508: v1(490.22,287.02) 493.522,283.718 520.954,283.718 522.224,284.988 P?.1
RL1: R25.1 U2.41 | length 43.5
  Top Layer w0.381: v1(459.74,287.02) 461.696,288.976 U2.41
  Bottom Layer w0.635: v1(459.74,287.02) 459.74,285.242 477.52,267.462 v2(477.52,259.715)
RL2: R26.1 U2.43 | length 37.8
  Top Layer w0.381: v1(463.55,285.75) 465.176,287.376 U2.43
  Bottom Layer w0.635: v1(463.55,285.75) 463.55,283.92 480.06,267.41 v2(480.06,259.715)
RL3: R27.1 U2.36 | length 44.2
  Top Layer w0.381: v1(464.82,293.37) 465.214,292.976 U2.36
  Bottom Layer w0.635: v1(464.82,293.37) 465.836,292.354 465.836,284.734 482.6,267.97 v2(482.6,259.715)
RL4: R28.1 U2.2 | length 31.4
  Top Layer w0.381: U2.2 470.256,278.536 485.14,263.652 R28.1
RL5: R30.1 U2.3 | length 32.1
  Top Layer w0.381: U2.3 471.056,279.768 487.68,263.144 R30.1
RL6: R31.1 U2.4 | length 32.8
  Top Layer w0.381: U2.4 471.856,281.254 490.22,262.89 R31.1
RL7: R38.1 U2.5 | length 33.5
  Top Layer w0.381: U2.5 472.656,282.486 492.76,262.382 R38.1
RS: R9.1 U2.40 | length 33.3
  Top Layer w0.381: R9.1 451.104,312.039 451.104,300.736 462.064,289.776 U2.40
RS485_DE: IC4.3 J2.1 J3.2 | length 2
  Top Layer w0.508: J3.2 467.352,268.232 IC4.3
RS485_RE: IC4.2 J1.2 J2.2 | length 2
  Top Layer w0.508: J1.2 469.892,268.232 IC4.2
RW: R10.1 U2.39 | length 30.8
  Top Layer w0.381: R10.1 453.136,300.482 463.042,290.576 U2.39
RX_485: D8.1 D9.1 IC4.4 R24.2 | length 29.6
  Top Layer w0.508: D8.1 443.484,265.43 446.278,268.224 455.422,268.224 ; D9.1 453.644,266.446 455.422,268.224 ; IC4.4 455.422,268.224
RX_PIC: D10.1 D11.1 P4.4 R29.2 U2.1 | length 63.3
  Top Layer w0.381: R29.2 445.516,262.255 ; v1(446.024,263.652) 446.024,262.763 445.516,262.255 ; v1(450.85,273.05) 460.248,273.05 469.456,282.258 U2.1 ; D11.1 451.104,262.763 450.596,262.255 445.516,262.255
  Bottom Layer w0.381: v1(446.024,263.652) 446.024,268.224 v1(450.85,273.05)
  Bottom Layer w0.635: v1(440.944,262.636) 440.182,262.636 438.912,261.366 438.912,257.302 442.468,253.746 P4.4
RX_ZIGBEE: D12.1 D13.1 P3.4 R33.2 | length 29
  Bottom Layer w0.635: R33.2 v1(448.564,264.16) 449.072,263.652 v1(456.692,263.652) 456.184,263.144 P3.4
SCL: R6.2 U2.37 | length 35.5
  Top Layer w0.381: U2.37 471.348,292.176 472.186,291.338 v2(472.186,289.56)
  Bottom Layer w0.508: v2(472.186,289.56) 472.186,290.068 472.948,290.83 v2(500.38,290.83)
SCL': IC1.6 R4.1 R6.1 U3.6 | length 22.5
  Top Layer w0.508: IC1.6 508.254,290.83 509.524,292.1 509.524,300.99 508.254,302.26 U3.6
  Top Layer w0.635: R4.1 R6.1 IC1.6
SDA: R7.2 U2.42 | length 37.4
  Top Layer w0.381: U2.42 470.268,288.176 v2@470.408,288.036
  Bottom Layer w0.508: v2(470.338,288.106) 470.338,292.03 471.678,293.37 v2(500.634,293.37)
SDA': IC1.5 R3.1 R7.1 U3.5 | length 17.8
  Top Layer w0.635: IC1.5 R7.1 R3.1 502.793,303.911 503.682,304.8 U3.5
SPEAKER: R22.1 U2.32 | length 5.8
  Top Layer w0.381: R22.1 466.725,298.958 469.138,298.958 470.256,297.84 U2.32
TX_485: D10.2 D13.2 IC4.1 | length 33.3
  Top Layer w0.381: D10.2 446.024,260.604 446.532,261.112 455.422,261.112 456.184,260.35 D13.2
  Top Layer w0.508: D13.2 456.946,259.588 462.788,265.43 471.424,265.43 472.44,266.446 IC4.1
TX_PIC: D8.2 D12.2 P4.3 U2.44 | length 60.6
  Top Layer w0.381: v1(448.31,275.082) 459.994,275.082 467.806,282.894 U2.44
  Top Layer w0.762: P4.3 439.928,253.746 443.484,257.302 ; v1(443.484,259.588) 443.484,257.302 ; D12.2 448.564,257.81 448.056,257.302 443.484,257.302
  Bottom Layer w0.508: v1(443.484,259.588) 443.484,270.256 v1(448.31,275.082)
TX_ZIGBEE: D9.2 D11.2 P3.3 | length 10.7
  Top Layer w0.762: D11.2 D9.2 P3.3
X1: C16.2 U2.31 Y2.2 | length 22
  Top Layer w0.508: C16.2 459.832,312.455 Y2.2 461.519,308.609 471.056,299.072 U2.31
X2: C18.2 U2.30 Y2.1 | length 19.2
  Top Layer w0.508: C18.2 464.832,312.535 Y2.1 464.832,307.582 471.856,300.558 U2.30
pads on no net: "LCD1.Hole 0" LCD1.7 LCD1.8 LCD1.9 LCD1.10 U1.6 U2.12 U2.13 U2.33 U2.34 U2.35
copper on no net: | length 25.7
  Top Layer w0.381: 410.464,255.778 410.464,281.432

## Polygon pours and split planes (outlines as drawn)
GND on Top Layer "Bottom Layer-No Net" (solid, pour order 4): 410.21,248.92 538.48,248.92 538.48,322.58 410.21,322.58
GND on Bottom Layer "Bottom Layer-No Net" (solid, pour order 4): 410.21,248.92 538.48,248.92 538.48,322.58 410.21,322.58

## Other copper
Top Layer:
  rectangle net +3.3V: 426.212,268.732 432.816,275.082
  rectangle net GND: 410.21,280.416 413.258,295.148
  rectangle net +5V: 445.008,300.228 450.088,301.752
  rectangle net +3.3V: 431.546,249.936 435.864,252.222
  rectangle net +3.3V: 427.228,252.222 435.864,254
  rectangle net GND: 429.26,248.92 431.292,251.714
  rectangle net GND: 419.862,248.92 431.292,249.682
  rectangle net GND: 417.83,248.92 419.862,251.714
  rectangle net +5V: 420.116,252.222 422.148,254.254
  rectangle net +5V: 417.83,252.222 420.116,256.54
  rectangle net GND: 420.878,256.54 425.704,274.32
  rectangle net GND: 415.29,274.32 425.704,276.352
  rectangle net GND: 410.464,255.778 415.29,276.352
  rectangle net +3.3V: 426.212,256.54 430.53,273.812
  rectangle net +5V: 415.798,256.54 420.37,273.812
  rectangle net GND: 416.56,283.972 427.228,289.052
  rectangle net GND: 410.464,280.416 416.56,289.052
  rectangle net NetC1_1: 433.578,277.368 441.198,282.956
  rectangle net 12V: 417.068,279.4 424.942,283.464
  rectangle net 12V: 411.48,276.86 424.942,279.908
  rectangle net GND: 412.242,310.896 428.244,322.58
  rectangle net GND: 410.21,305.562 412.242,322.58
  rectangle net GND: 420.37,294.64 424.434,299.466
  rectangle net NetC1_1: 413.766,289.56 428.498,294.132
  rectangle net NetC1_1: 424.942,289.56 428.498,297.434
  rectangle net NetD4_2: 424.942,297.688 440.69,298.958
  rectangle net GND: 418.846,299.466 440.69,300.482
  rectangle net GND: 410.21,294.64 420.37,305.562
  rectangle net GND: 424.18,302.768 430.022,305.562
  rectangle net +5V: 420.878,300.99 423.672,307.34
  rectangle net +5V: 420.878,300.99 430.53,302.26
  rectangle net +5V: 430.53,300.99 446.278,306.07
  rectangle net +5V: 412.75,306.07 446.278,310.388
  rectangle net NetD4_2: 433.324,291.846 440.69,297.942
  rectangle net +3.3V: 427.482,254 430.53,256.794
  rectangle net +5V: 502.412,281.178 508.762,286.258
  rectangle net +5V: 442.722,289.56 445.262,305.816
  rectangle net +5V: 440.436,304.038 442.722,305.816
  rectangle net +5V: 438.15,289.306 451.104,290.576
  rectangle net +3.3V: 434.848,286.258 451.104,288.29
Bottom Layer:
  rectangle net +5V: 499.11,294.894 510.032,298.45
  rectangle net NetC1_1: 424.434,290.576 436.118,292.608
  rectangle net NetC1_1: 433.578,277.368 436.118,291.846

## Silkscreen, mask and mechanical layers (free items; w line width, h text height)
Top Overlay:
  lines w0.254: 410.21,322.58 538.48,322.58 538.48,249.174

## Text inside footprints (layer, text, board x,y; h text height)
LS1: Top Overlay "+" at 450.736,300.279 h1.52